# Altium PCB PCB_1.PcbDoc
Units mm, origin at the board's own origin, x right, y up, seen from the top; angles counter-clockwise.
Board outline 88.18 x 44.62 mm, 2 copper layers (Top Layer, Bottom Layer); 40 components, 24 nets, 88 pads, 2 vias.
Unrouted connection lines stored in the file: 12.
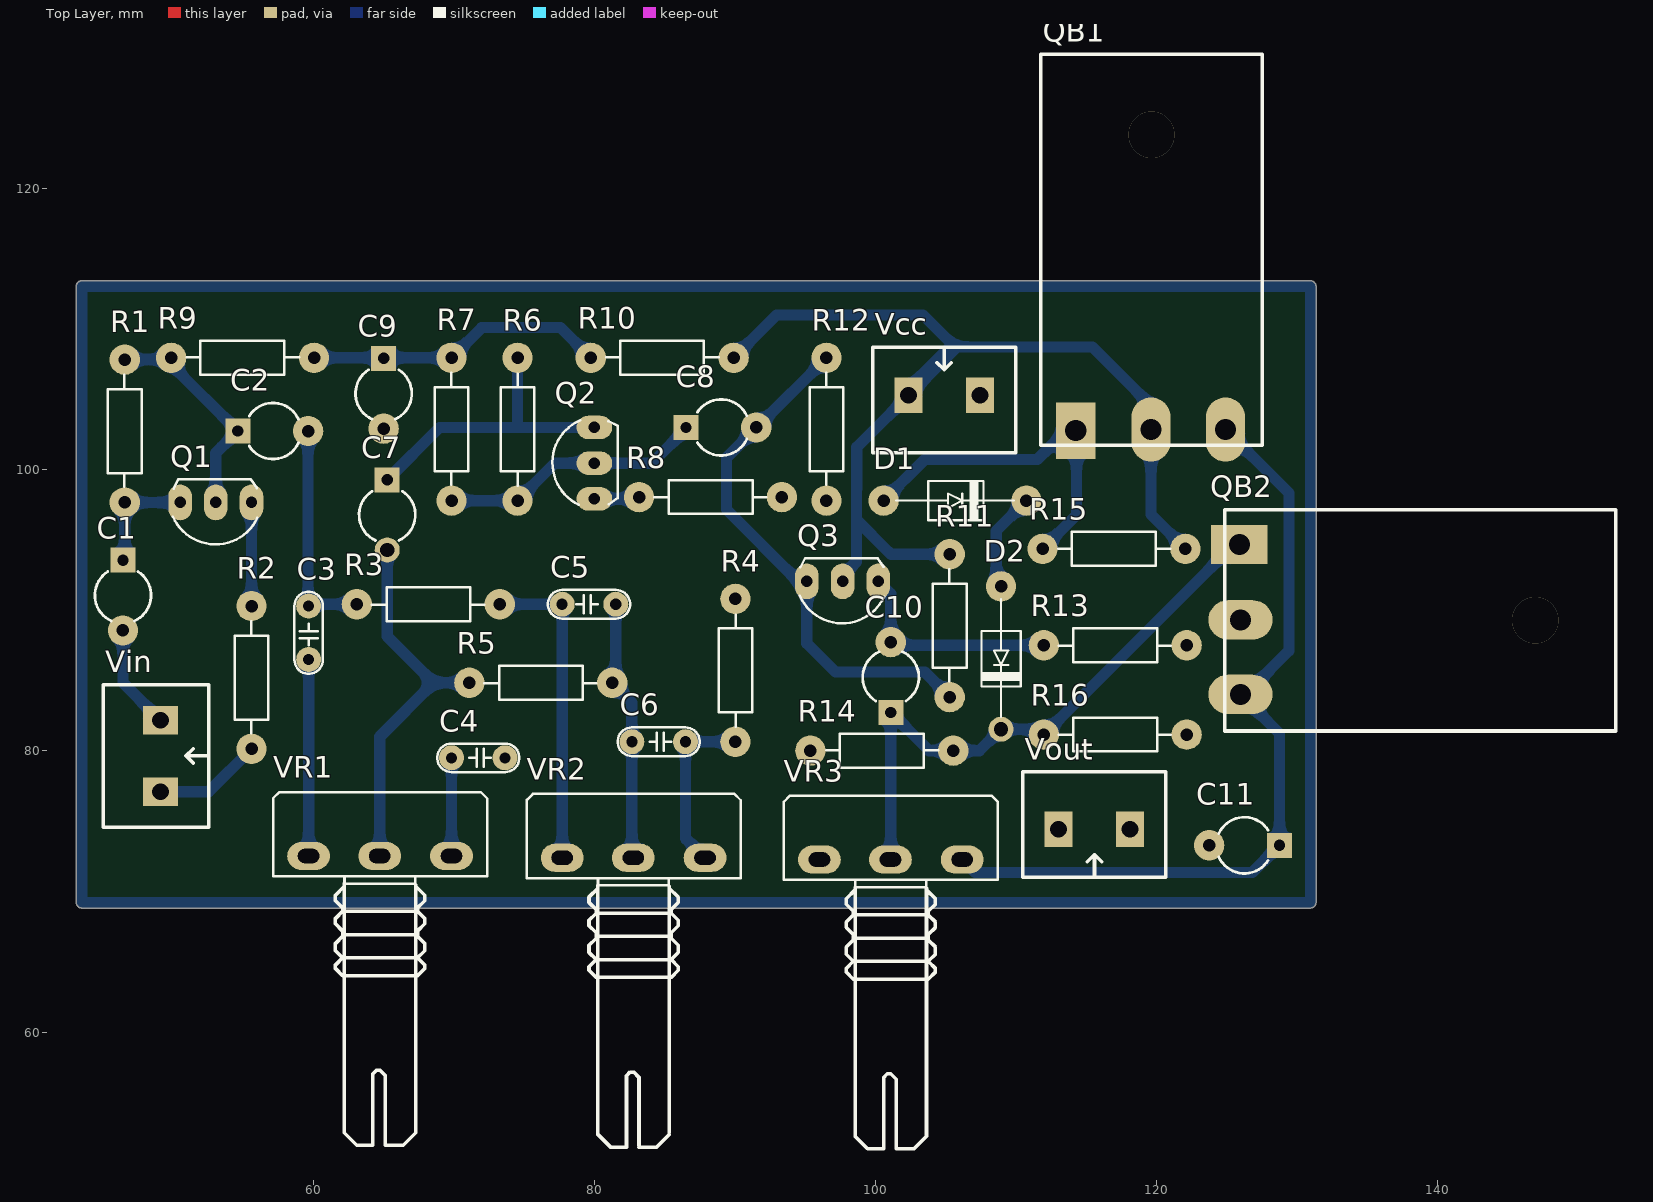
[diagram p0: Top Layer view]
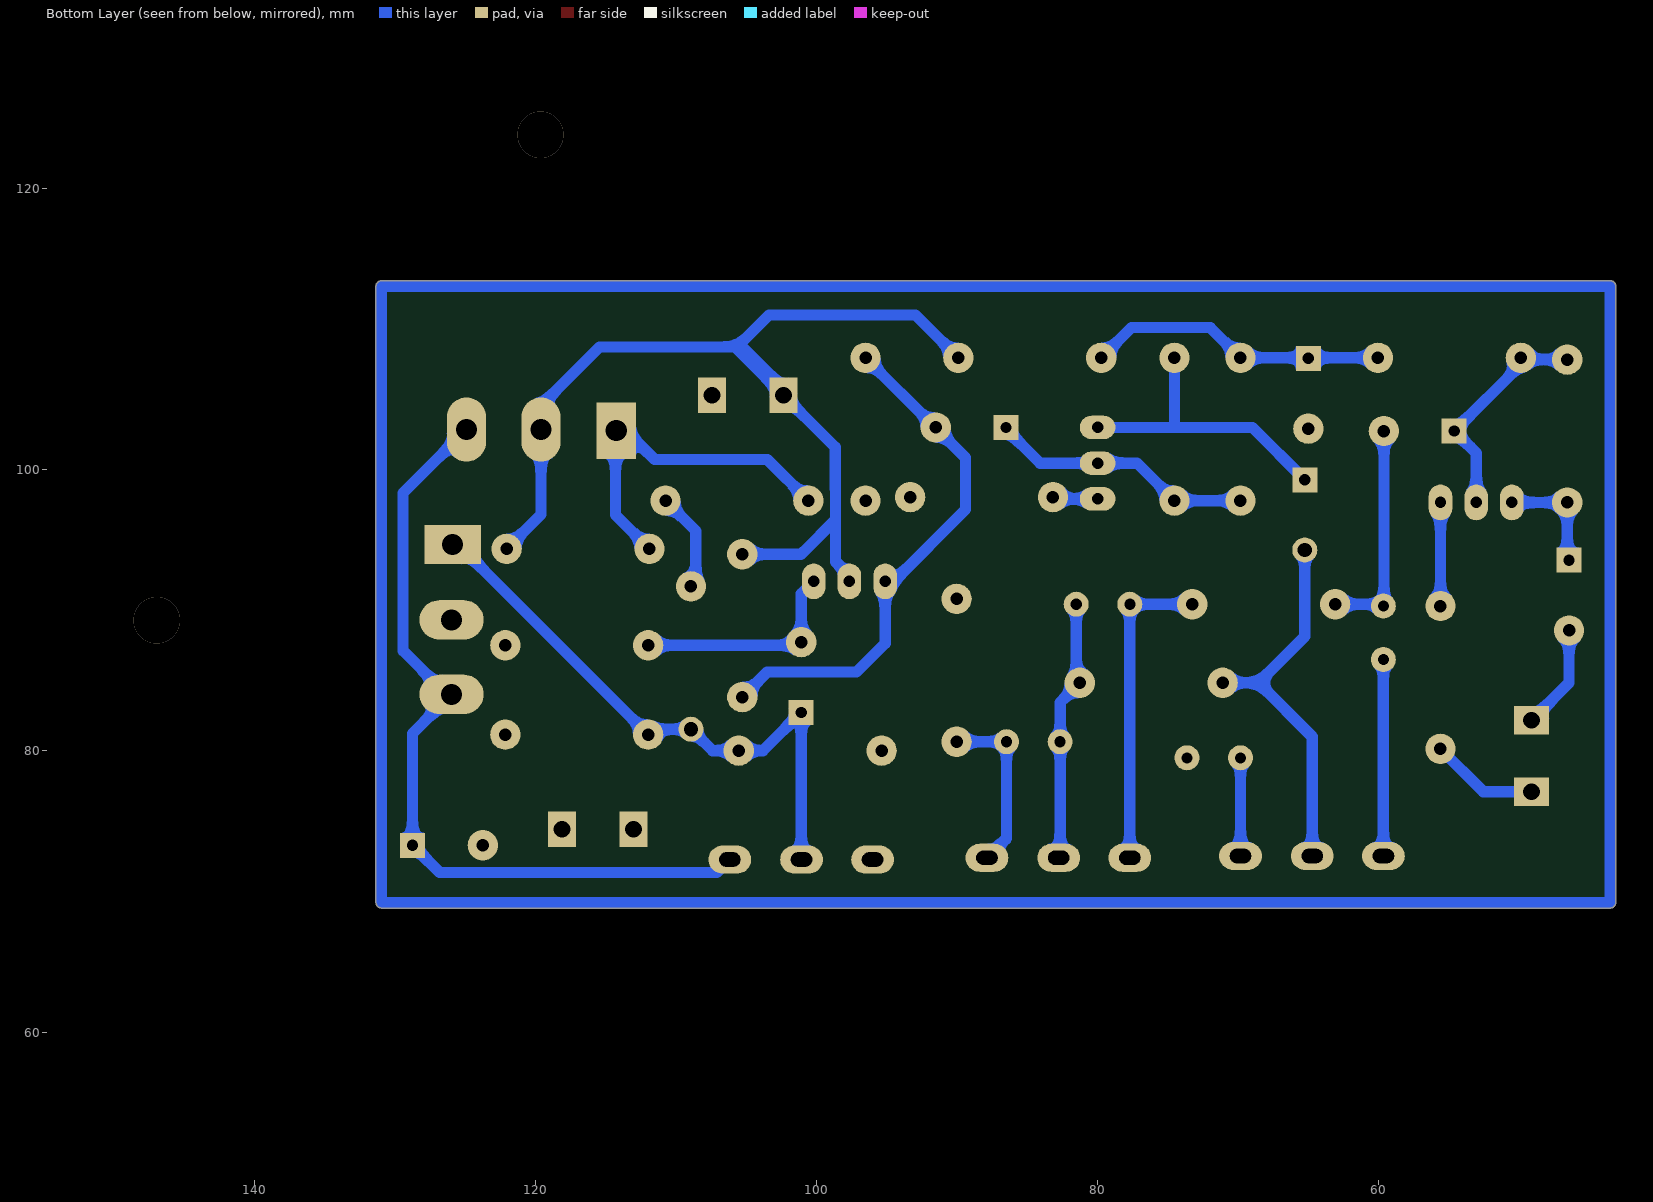
[diagram p1: Bottom Layer view, seen from below]
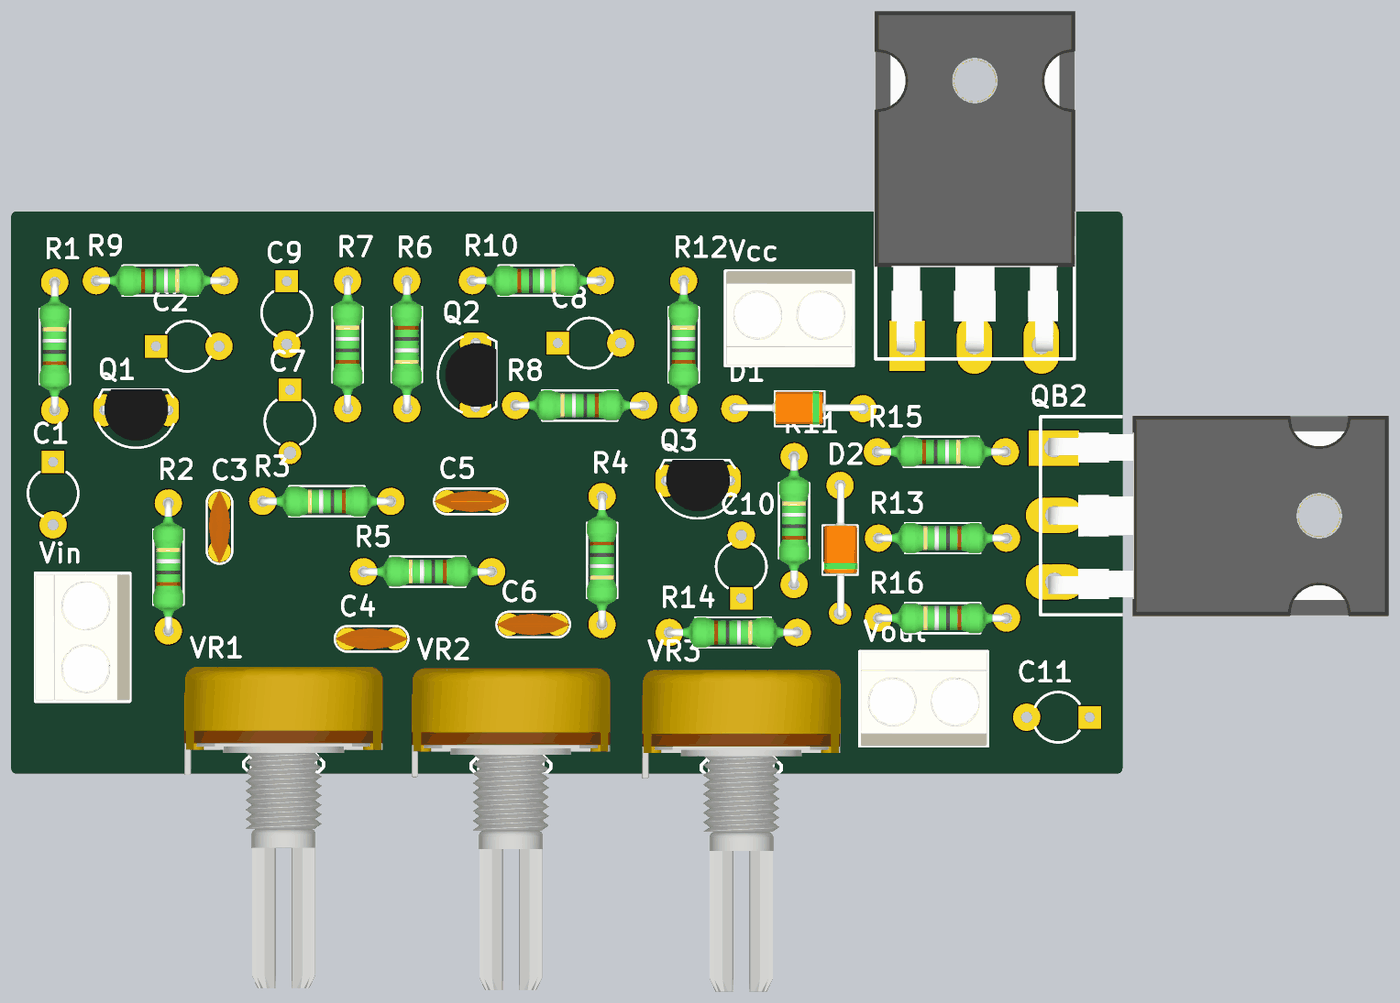
[diagram p2: 3D render of the assembled board from above, using the file's embedded part models]

## Layer stack, top to bottom
Top Solder: solder mask 0.0102, Solder Resist, Dk 3.5
Top Layer: signal copper 0.0356
Dielectric 1: dielectric 0.32, FR-4, Dk 4.8
Bottom Layer: signal copper 0.0356
Bottom Solder: solder mask 0.0102, Solder Resist, Dk 3.5

## Board outline
43.561,68.815 cw(c43.561,69.215) 43.161,69.215 43.161,113.03 cw(c43.561,113.03) 43.561,113.43 130.937,113.43 cw(c130.937,113.03) 131.337,113.03 131.337,69.215 cw(c130.937,69.215) 130.937,68.815

## Design rules (kind name [scope] priority, off if disabled: settings)
Clearance [All] p1: gap=0.457
PolygonConnect [All] p1: connectstyle=Relief reliefconductorwidth=0.254 reliefentries=4 polygonreliefangle="90 Angle" airgapwidth=0.254
RoutingVias [All] p1: holewidth=0.711 width=1.27 viastyle="Through Hole" minholewidth=0.711 minwidth=1.27 maxholewidth=0.711 maxwidth=1.27
SolderMaskExpansion [All] p1: expansion=0.102
Width [All] p1: maxlimit=1 minlimit=0.8 preferedwidth=0.8
30 further rules are at their usual default settings.

## Components (designator, comment, footprint, x,y, rotation, side; value= is the part's Value field where it differs from the comment)
C1 "Cap2" CAPR5-4X5#1 46.482,91.059 r270 top
C2 "Cap2" CAPR5-4X5#1 57.15,102.743 r0 top
C3 "Cap Non-Pol" CN1.5 59.69,86.487 r90 top
C4 "Cap Non-Pol" CN1.5 73.66,79.502 r180 top
C5 "Cap Non-Pol" CN1.5 77.724,90.424 r0 top
C6 "Cap Non-Pol" CN1.5 86.487,80.645 r180 top
C7 "Cap2" CAPR5-4X5#2 65.278,96.774 r270 top
C8 "Cap2" CAPR5-4X5#1 89.027,102.997 r0 top
C9 "Cap2" CAPR5-4X5#1 65.024,105.41 r270 top
C10 "Cap2" CAPR5-4X5#1 101.092,85.231 r90 top
C11 "Cap2" CAPR5-4X5#1 126.238,73.279 r180 top
D1 "Diode" DIO-1A#1 100.584,97.79 r0 top
D2 "Diode" DIO-1A#2 108.935,91.694 r270 top
Q1 "C1815" QTO-92 53.086,97.663 r180 top
Q2 "C1815" QTO-92 80.01,100.457 r90 top
Q3 "C1815" QTO-92 97.663,92.052 r180 top
QB1 "2SD718" TO247h 114.173,102.743 r0 top
QB2 "2SB688" TO247h 125.857,94.742 r270 top
R1 "1Meg" RES-1/4W 46.482,102.362 r270 top
R2 "220" RES-1/4W 55.499,84.836 r270 top
R3 "10K" RES-1/4W 68.58,90.297 r0 top
R4 "1.2K" RES-1/4W 90.17,86.106 r90 top
R5 "10K" RES-1/4W 76.581,84.709 r0 top
R6 "1Meg" RES-1/4W 74.676,103.251 r90 top
R7 "15K" RES-1/4W 69.723,102.489 r270 top
R8 "470" RES-1/4W 88.646,97.917 r0 top
R9 "15K" RES-1/4W 54.61,108.077 r180 top
R10 "4.7K" RES-1/4W 84.455,108.077 r180 top
R11 "15K" RES-1/4W 105.156,88.519 r270 top
R12 "15K" RES-1/4W 96.393,102.489 r270 top
R13 "220" RES-1/4W 117.437,87.376 r0 top
R14 "22k" RES-1/4W 100.076,80.137 r180 top
R15 "1k" RES-1/4W 116.586,94.488 r180 top
R16 "1k" RES-1/4W 117.437,81.026 r0 top
Vcc "Domino 2" "DOMINO 2- 5mm" 104.902,105.283 r0 top
Vin "Domino 2" "DOMINO 2- 5mm" 49.149,79.629 r270 top
Vout "Domino 2" "DOMINO 2- 5mm" 115.57,74.422 r180 top
VR1 "50K" VR-S1 64.77,72.517 r0 top
VR2 "50K" VR-S1 82.804,72.39 r0 top
VR3 "50K" VR-S1 101.092,72.263 r0 top

## Footprints (in the part's own frame and the unit in brackets; to place one, negate y for a bottom-side part, rotate by r counter-clockwise, add the part's x,y. Pads: shape width x height; smd on the part's side, far side on the other; paste and mask are expansions set on the pad)
CAPR5-4X5#1 [mm] "Capacitor; 2 Leads"
  rect 1.78x1.78 hole 0.8: 1(-2.5,0)
  round 2.159 hole 0.889: 2(2.5,0)
  silkscreen extent -1.69,-2 1.82,2
CAPR5-4X5#2 [mm] "Capacitor; 2 Leads"
  rect 1.78x1.78 hole 0.8: 1(-2.5,0)
  round 1.778 hole 1.016: 2(2.5,0)
  silkscreen extent -1.69,-2 1.82,2
CN1.5 [mil]
  round 70 hole 31: 1(0,0) 2(150,0)
  silkscreen extent -40,-40 190,40, body extent -40,-33 190,33, height 235
DIO-1A#1 [mil]
  round 85 hole 35: 1(0,0) 2(400,0)
  silkscreen extent 35,-55 365,55, body extent -11,-50 411,54, height 102
DIO-1A#2 [mil]
  round 85 hole 35: 1(0,0)
  round 70 hole 40: 2(400,0)
  silkscreen extent 35,-55 365,55, body extent -11,-50 411,54, height 102
"DOMINO 2- 5mm" [mm]
  rect 2x2.5 hole 1.2: 1(-2.54,0) 2(2.54,0)
  silkscreen extent -5.08,-4.08 5.08,3.43, body extent -5,-4.07 5,3.43, height 10
QTO-92 [mil] "TO-92"
  oval 66x100 hole 32: 1(-100,0) 2(0,0) 3(100,0)
  silkscreen extent -117,-65 120,118, body extent -109,-66 109,95, height 245
RES-1/4W [mil]
  round 85 hole 35: 1(-215,5) 2(185,5)
  silkscreen extent -173,-42 141,52, body extent -227,-42 197,52, height 95
TO247h [mil]
  rect 110x157.48 hole 59.06: 1(3,1)
  oval 110x180 hole 59.06: 2(213.66,4) 3(422.32,4)
  silkscreen extent -95,-40 525,1055, body extent -98,-15 528,1047, height 213
VR-S1 [mil]
  oval 120x78.74 hole 40 slot 60 at 0 deg: 1(-200,0) 2(-1,0) 3(200,0)
  silkscreen extent -299,-810 300,179, body extent -310,-818 310,188, height 839

## Part data
C1 C2 C3 C4 C5 C6 C7 C8 C9 C10 C11: "Capacitor"
D1 D2: "Default Diode"
Q1 Q2 Q3: "NPN Bipolar Transistor"
QB1: library part 2SC5200, "Transistor Power Supply"
QB2: "Transistor Power Supply"
R1 R2 R3 R4 R5 R6 R7 R8 R9 R10 R11 R12 R13 R14 R15 R16: library part Res, "Res"
Vcc Vin Vout: "Domino, 2-Pin"
VR1 VR2 VR3: library part VR-S, "Var Resistor"

## Via types
v1: diameter 3.3, hole 3.3, Top Layer to Bottom Layer, 2 vias

## Nets (pads, with @x,y where several pads share a name; then routed paths per layer and width w, separated by ;. In a path a pad name is that pad's centre, name@x,y a point inside that pad or via, vN(x,y) a via of type N, cw(c..) or ccw(c..) an arc to the next point about the centre after c; other vN are vias at no path point)
GND: C4.1 C9.2 QB2.2 R2.2 R4.2 R8.2 R12.2 R13.2 R14.2 R16.2 Vcc.2 Vin.2 Vout.2 | length 7.7
  Bottom Layer w0.8: Vin.2 52.578,77.089 R2.2
NetC1_1: C1.1 Q1.3 R1.2 | length 7.9
  Bottom Layer w0.8: C1.1@46.609,93.686 R1.2 Q1.3
NetC1_2: C1.2 Vin.1 | length 7.5
  Bottom Layer w0.8: C1.2 46.482,84.836 Vin.1
NetC2_1: C2.1 Q1.2 R1.1 R9.2 | length 16.1
  Bottom Layer w0.8: R1.1 R9.2@49.784,107.823 ; R9.2 49.911,107.482 C2.1 53.086,101.179 Q1.2
NetC2_2: C2.2 C3.2 R3.1 | length 15.9
  Bottom Layer w0.8: C3.2@59.65,90.337 C2.2 ; C3.2 59.817,90.424 R3.1
NetC3_1: C3.1 VR1.1 | length 14
  Bottom Layer w0.8: VR1.1 C3.1
NetC4_2: C4.2 VR1.3 | length 7
  Bottom Layer w0.8: VR1.3 C4.2
NetC5_1: C5.1 R3.2 VR2.1 | length 22.5
  Bottom Layer w0.8: R3.2 C5.1 VR2.1
NetC5_2: C5.2 C6.2 R5.2 VR2.2 | length 18.3
  Bottom Layer w0.8: R5.2 82.677,83.439 C6.2 VR2.2@82.677,72.492 ; R5.2@81.534,85.09 C5.2
NetC6_1: C6.1 R4.1 VR2.3 | length 12.4
  Bottom Layer w0.8: VR2.3 86.487,73.787 C6.1 R4.1
NetC7_1: C7.1 Q2.3 R6.2 | length 21.2
  Bottom Layer w0.8: C7.1 69.001,102.997 Q2.3 ; 74.549,102.997 R6.2
NetC7_2: C7.2 R5.1 VR1.2 | length 27.3
  Bottom Layer w0.8: VR1.2 64.745,81.001 68.58,84.836 ; C7.2 65.278,88.138 68.58,84.836 ; R5.1 68.58,84.836
NetC8_1: C8.1 Q2.2 R6.1 R7.2 | length 19
  Bottom Layer w0.8: R7.2 R6.1 77.216,100.457 81.788,100.457 84.114,100.457 C8.1@86.654,102.997
NetC9_1: C9.1 R7.1 R9.1 R10.2 | length 21.5
  Bottom Layer w0.8: R9.1 R7.1 72.009,110.109 77.597,110.109 R10.2
NetC10_1: C10.1 D2.2 QB2.1 R14.1 R16.1 VR3.2 | length 42.4
  Bottom Layer w0.8: VR3.2 101.092,72.288 C10.1 103.813,80.01 R14.1 107.411,80.01 D2.2 111.595,81.534 R16.1 QB2.1@125.488,94.666
NetC10_2: C10.2 Q3.1 R13.1 | length 15.7
  Bottom Layer w0.8: Q3.1 101.092,91.162 C10.2 101.32,87.503 R13.1
NetC11_1: C11.1 QB1.3 QB2.3 VR3.3 | length 58.5
  Bottom Layer w0.8: VR3.3 107.093,71.342 126.801,71.342 C11.1 128.738,81.236 QB2.3 QB2.3@125.305,84.669 ; QB1.3 129.413,98.332 129.413,87.122 QB2.3@126.306,84.015
NetC11_2: C11.2 Vout.1
NetD1_1: D1.1 QB1.1 R15.2 | length 24.5
  Bottom Layer w0.8: D1.1 103.505,100.711 111.506,100.711 QB1.1@113.563,102.768 ; R15.2 114.3,96.774 114.3,102.718 QB1.1
NetD1_2: D1.2 D2.1 | length 7.1
  Bottom Layer w0.8: D2.1 108.585,92.044 108.585,95.631 D1.2
NetQ1_1: Q1.1 R2.1 | length 7.4
  Bottom Layer w0.8: R2.1 Q1.1
NetQ2_1: Q2.1 R8.1 | length 3
  Bottom Layer w0.8: Q2.1 R8.1@83.058,97.917
V1: C8.2 Q3.3 R11.2 R12.1 | length 37.8
  Bottom Layer w0.8: R12.1 91.654,103.084 91.654,102.997 91.567,102.997 89.408,100.838 89.408,97.155 94.511,92.052 Q3.3 95.123,87.63 97.155,85.598 103.505,85.598 R11.2
VCC: Q3.2 QB1.2 R10.1 R11.1 R15.1 Vcc.1 | length 77
  Bottom Layer w0.8: R10.1 92.964,110.998 103.378,110.998 105.727,108.648 Vcc.1 98.679,101.6 98.679,98.624 98.647,98.592 98.647,93.44 97.663,92.456 Q3.2 ; 98.679,96.393 100.893,94.179 100.905,94.179 101.104,93.98 R11.1 ; Vcc.1@102.362,105.791 105.283,108.712 115.443,108.712 119.6,104.555 QB1.2 119.6,96.808 R15.1
pads on no net: VR3.1
copper on no net: | length 262.4
  Bottom Layer w0.8: 43.561,69.215 43.561,113.03 130.937,113.03 130.937,69.215 43.561,69.215
  other v1: 146.939,89.281 119.634,123.825